# EAGLE board wzium (EAGLE 9.4.2)

Size 160 x 100 mm. Coordinates in mm from the lower left corner, seen from the top.
Outline: 0,0 160,0 160,100 0,100 0,0
Copper layers (1*16): Top 0.035mm / dielectric 1.5mm / Bottom 0.035mm
Design rules "default": minimum track width 6mil, minimum drill 0.35mm, track to track 6mil, track to pad 6mil, pad to pad 6mil, via to via 6mil, smd to smd 6mil, copper to edge 40mil, drill to drill 6mil, minimum pad ring 10mil, minimum via ring 8mil, stop-mask expansion 4mil, vias tented up to drill 0mil, thermal gap 10mil

## Footprints (pad centres in the part's own frame; a part is rotated, then mirrored left to right if it is on the bottom)
2X20_SHROUDED = drill 1.016 pad 1.88: 1 -1.27,24.13; 2 1.27,24.13; 3 -1.27,21.59; 4 1.27,21.59; 5 -1.27,19.05; 6 1.27,19.05; 7 -1.27,16.51; 8 1.27,16.51; 9 -1.27,13.97; 10 1.27,13.97; 11 -1.27,11.43; 12 1.27,11.43; 13 -1.27,8.89; 14 1.27,8.89; 15 -1.27,6.35; 16 1.27,6.35; 17 -1.27,3.81; 18 1.27,3.81; 19 -1.27,1.27; 20 1.27,1.27; 21 -1.27,-1.27; 22 1.27,-1.27; 23 -1.27,-3.81; 24 1.27,-3.81; 25 -1.27,-6.35; 26 1.27,-6.35; 27 -1.27,-8.89; 28 1.27,-8.89; 29 -1.27,-11.43; 30 1.27,-11.43; 31 -1.27,-13.97; 32 1.27,-13.97; 33 -1.27,-16.51; 34 1.27,-16.51; 35 -1.27,-19.05; 36 1.27,-19.05; 37 -1.27,-21.59; 38 1.27,-21.59; 39 -1.27,-24.13; 40 1.27,-24.13
M3-HOLE = hole 3.2: 0,0

## Placement (x,y rotation side)
J1  RASPBERRYPI-40-PIN-GPIO_PTH  [2X20_SHROUDED]  76,41 270 top
U$1  [M3-HOLE]  46.67,26.38 0 top
U$2  [M3-HOLE]  46.67,75.38 0 top
U$3  [M3-HOLE]  104.67,75.38 0 top
U$4  [M3-HOLE]  104.67,26.38 0 top
U$5  [M3-HOLE]  37.67,26.38 0 top
U$6  [M3-HOLE]  37.67,75.38 0 top
U$7  [M3-HOLE]  113.67,26.38 0 top
U$8  [M3-HOLE]  113.67,75.38 0 top

## Library data of the parts
J1 = SparkFun-Connectors; PROD_ID: CONN-12263; SF_ID: PRT-13054
U$1-U$8 = WingTechCorner

## Nets
3.3V: J1.1 J1.17
5V: J1.2 J1.4
GND: J1.6 J1.9 J1.14 J1.20 J1.25 J1.30 J1.34 J1.39

## Tracks (layer width: path | path; a pad name or v marks a point on that pad's centre or on a via)
3.3V  (1 unrouted)
5V  (1 unrouted)
GND  (7 unrouted)